# Altium PCB ADV7611-3.PcbDoc
Units mil, origin at the board's own origin, x right, y up, seen from the top; angles counter-clockwise.
Board outline 1436.53 x 1983.15 mil, 2 copper layers (Top Layer, Bottom Layer), stack 12.8 mil thick; 57 components, 82 nets, 360 pads, 158 vias.
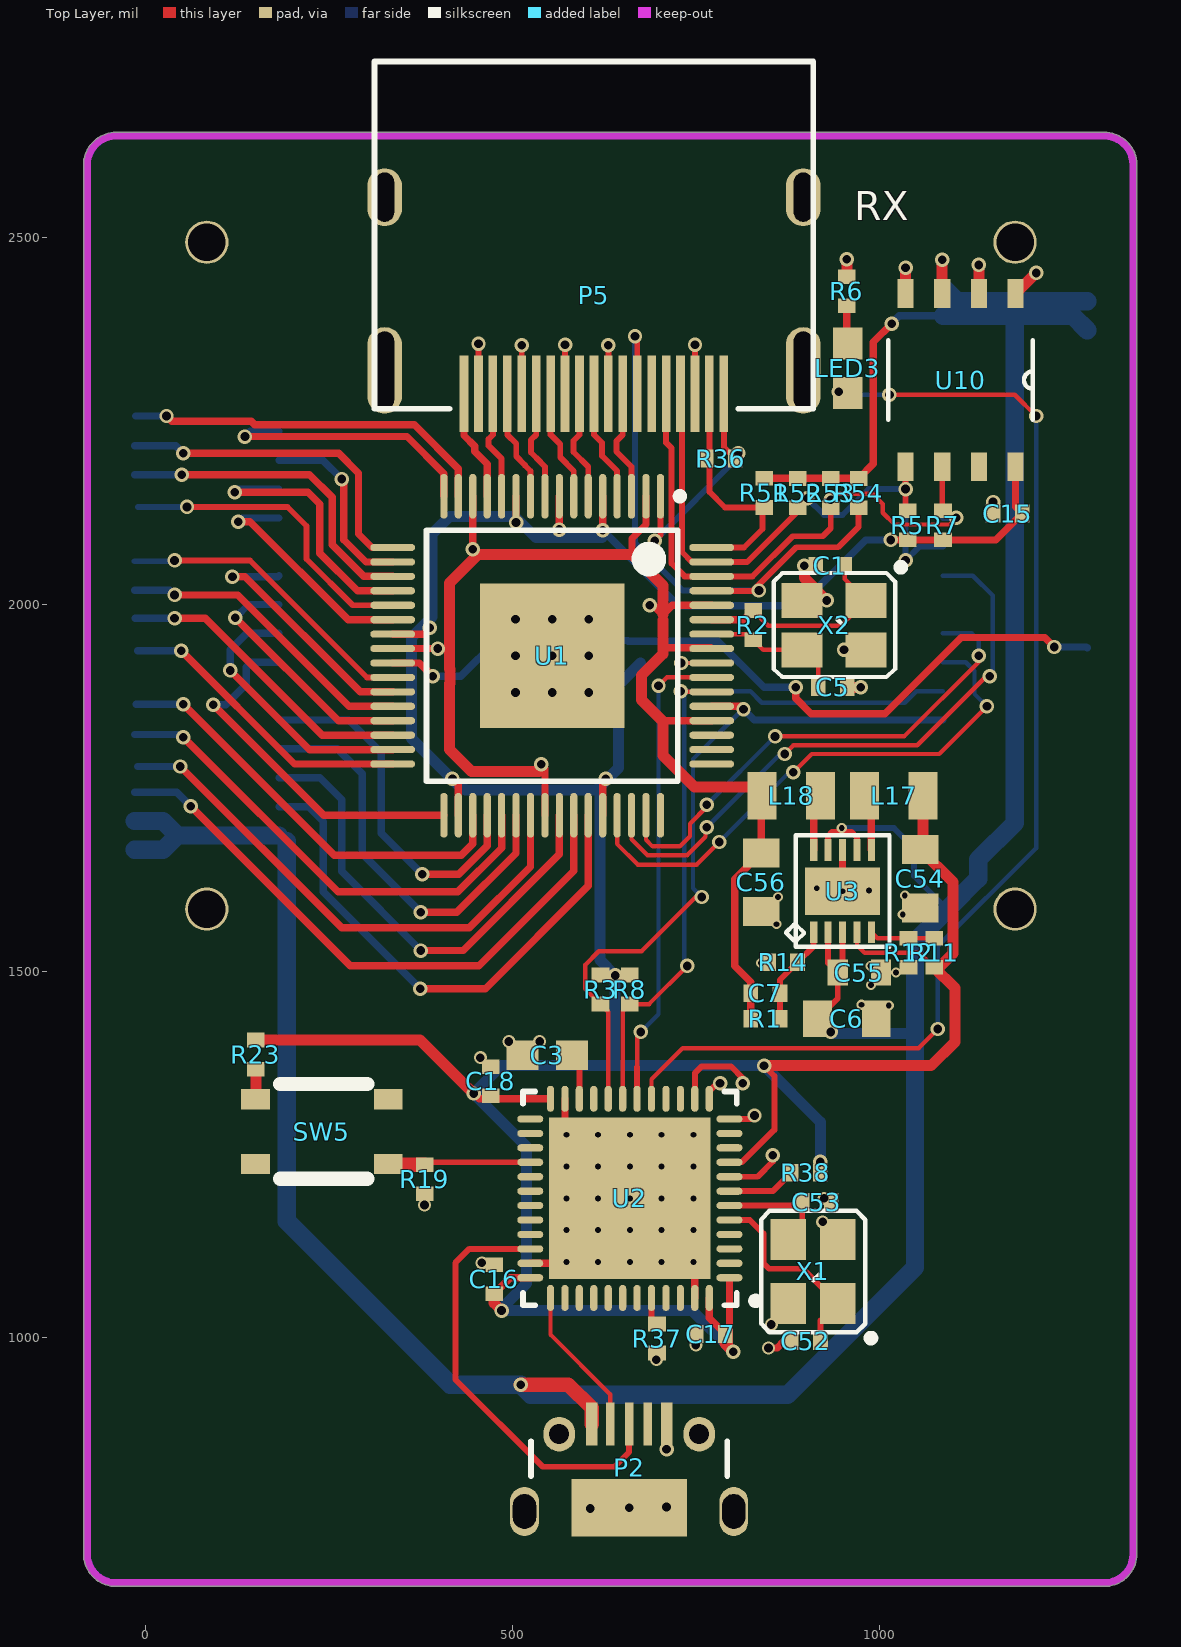
[diagram p0: Top Layer view]
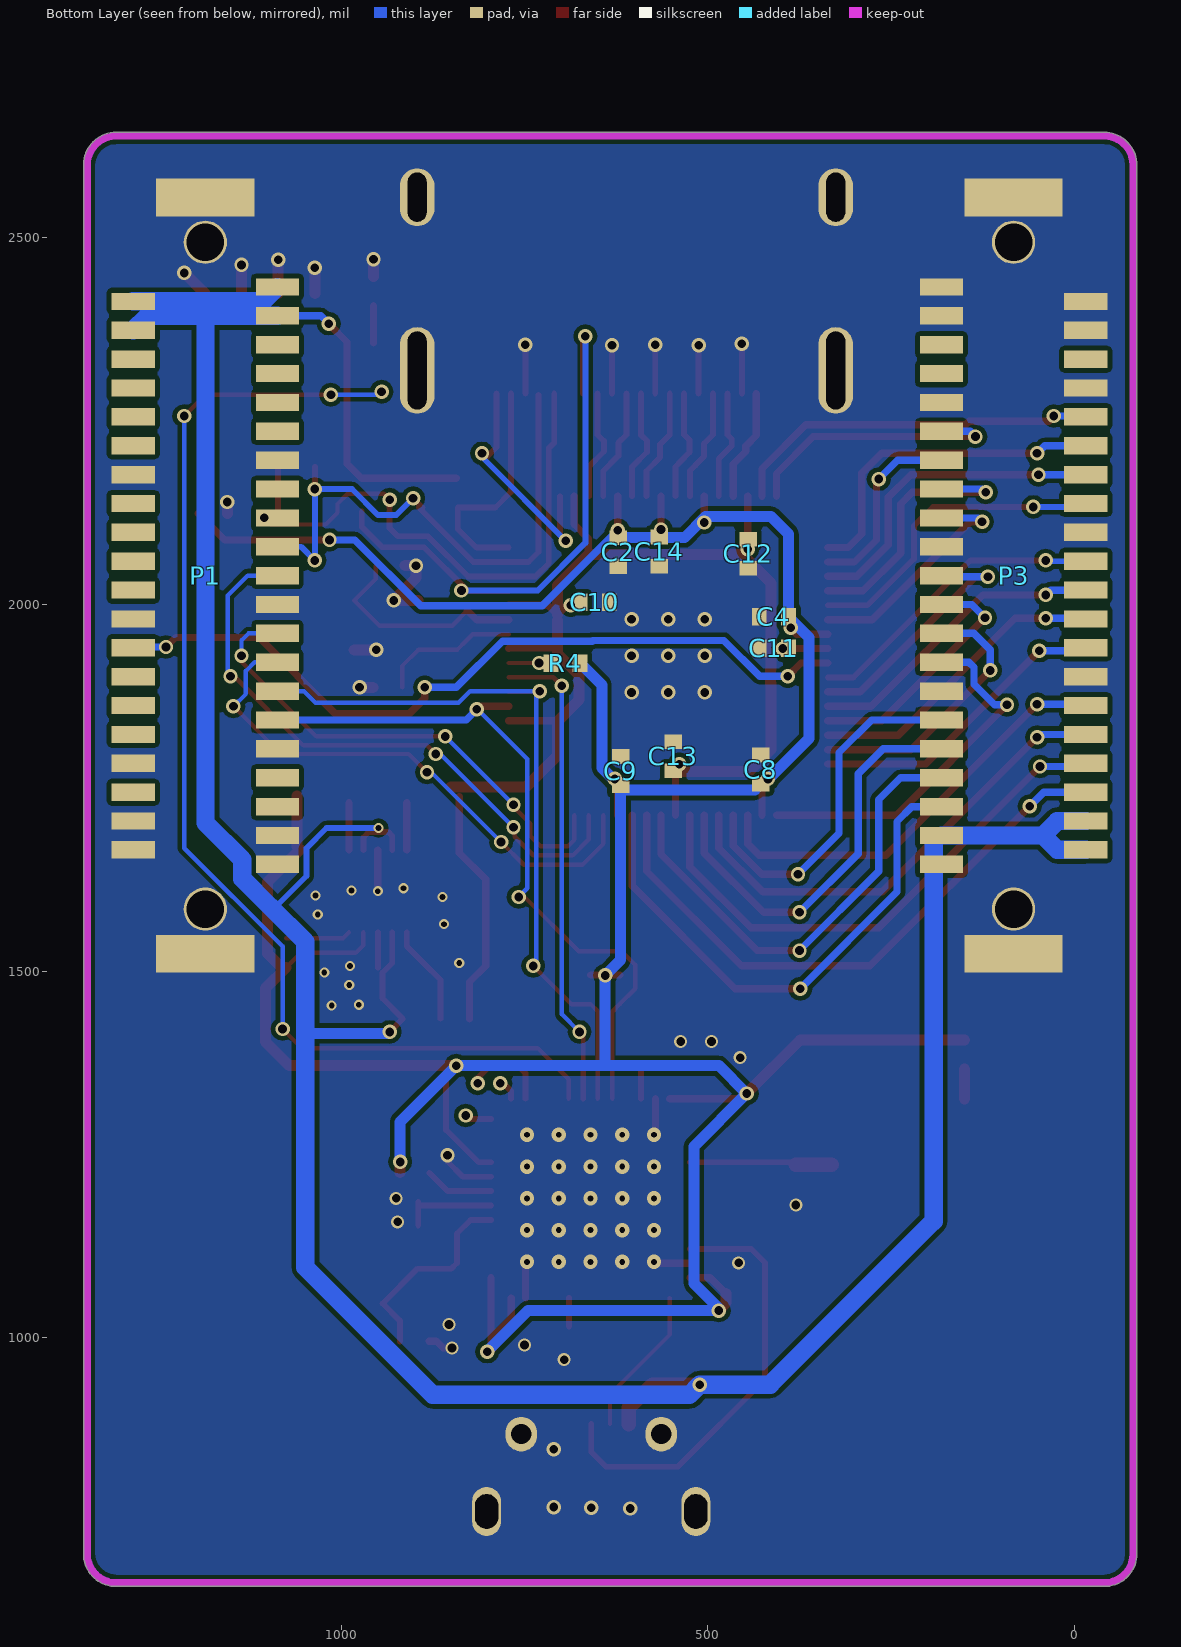
[diagram p1: Bottom Layer view, seen from below]

## Layer stack, top to bottom
Top Solder: solder mask 0.4, Solder Resist, Dk 3.5
Top Layer: signal copper 1.4
Dielectric 1: core 10, FR-4, Dk 4.2
Bottom Layer: signal copper 1.4
Bottom Solder: solder mask 0.4, Solder Resist, Dk 3.5

## Board outline
-85.11,705.09 ccw(c-40.72,705.09) -40.72,660.71 ccw(c-40.72,665.72) -40.69,660.71 1307.04,660.71 ccw(c1307.04,705.09) 1351.43,705.09 ccw(c1346.41,705.09) 1351.43,705.13 1351.43,2602.73 ccw(c1346.41,2602.73) 1351.16,2604.35 ccw(c1307.04,2599.47) 1307.04,2643.86 ccw(c1307.04,2638.84) 1306.97,2643.86 -40.72,2643.86 ccw(c-40.72,2599.47) -85.11,2599.47 ccw(c-80.09,2599.47) -85.11,2599.44

## Design rules (kind name [scope] priority, off if disabled: settings)
Clearance Clearance_1 [(InNamedPolygon('Bottom Layer-No Net')) vs Not InNet('GND')] p1: gap=15 ignorepadtopadclearanceinfootprint=FALSE except(0: Arc-Hole Track-Hole SMDPad-Hole THPad-Hole Via-Hole Fill-Hole Poly-Hole Region-Hole Text-Hole)
Clearance [All] p2: gap=6 ignorepadtopadclearanceinfootprint=FALSE except(0: Arc-Hole Track-Hole SMDPad-Hole THPad-Hole Via-Hole Fill-Hole Poly-Hole Region-Hole Text-Hole)
DiffPairsRouting [All] p1: maxlimit=10 minlimit=10 mostfreqgap=10 toplayer_minwidth=5.98 toplayer_maxwidth=15 toplayer_prefwidth=15 bottomlayer_minwidth=5.98 bottomlayer_maxwidth=15 bottomlayer_prefwidth=15 maxuncoupledlength=500
MinimumSolderMaskSliver [All] p1 off: minsoldermaskwidth=10
PlaneClearance [All] p1: clearance=10
PlaneConnect [All] p1: planeconnectstyle=Direct reliefexpansion=20 reliefentries=4 reliefconductorwidth=10 reliefairgap=10
PolygonConnect [All] p1: connectstyle=Direct reliefconductorwidth=10 reliefentries=4 polygonreliefangle="90 Angle" airgapwidth=10
RoomDefinition HDMI [InComponentClass('HDMI')] p1 off: confinementstyle=ConfineIn formatcopy=TRUE lockcomponents=FALSE outline 1396,717 2894,717 2894,1312 1396,1312
RoomDefinition interface [InComponentClass('interface')] p2 off: confinementstyle=ConfineIn formatcopy=TRUE lockcomponents=FALSE outline -5605,-2240 -3605,-2240 -3605,-1240 -5605,-1240
RoomDefinition MCU [InComponentClass('MCU')] p3 off: confinementstyle=ConfineIn formatcopy=TRUE lockcomponents=FALSE outline -595,900 1750,900 1750,1140 -595,1140
RoutingVias [All] p1: holewidth=12 width=20 viastyle="Through Hole" minholewidth=11.81 minwidth=19.68 maxholewidth=28 maxwidth=50
SilkToBoardRegionClearance [All] p1 off:
SilkToSilkClearance [All] p1 off: silktosilkclearance=10
SilkToSolderMaskClearance [IsPad] p1 off: minsilkscreentomaskgap=10 clearancetoexposedcopper=TRUE
SolderMaskExpansion [All] p1: expansion=4
Width [All] p1: maxlimit=60 minlimit=6 preferedwidth=6
23 further rules are at their usual default settings.

## Classes and differential pairs
component class MCU: C3 C6 C7 C16 C17 C18 C52 C53 C54 C55 C56 L17 L18 LED3 P2 R1 R6 R11 R12 R14 R19 R23 R28 R37 R38 SW5 U2 U3 X1
component class interface: P1 P3
component class HDMI: C1 C2 C4 C5 C8 C9 C10 C11 C12 C13 C14 C15 P5 R2 R3 R4 R5 R7 R8 R36 R51 R52 R53 R54 U1 U10 X2
net class TMDS: TMDS_CLK_N TMDS_CLK_P TMDS_D0_N TMDS_D0_P TMDS_D1_N TMDS_D1_P TMDS_D2_N TMDS_D2_P
differential pair TMDS_CLK: +TMDS_CLK_P -TMDS_CLK_N
differential pair TMDS_D0: +TMDS_D0_P -TMDS_D0_N
differential pair TMDS_D1: +TMDS_D1_P -TMDS_D1_N
differential pair TMDS_D2: +TMDS_D2_P -TMDS_D2_N

## Components (designator, comment, footprint, x,y, rotation, side; value= is the part's Value field where it differs from the comment)
C1 "Cap" 0402 933,2053 r0 top value=47p
C2 "Cap" 0402 622,2071 r90 bottom value=0.1uF
C3 "Cap" 0603 547,1385 r0 top value=4.7uF
C4 "Cap" 0402 410,1983 r180 bottom value=0.1uF
C5 "Cap" 0402 937,1887 r180 top value=47p
C6 "10UF" 0805 956,1435 r180 top
C7 "33pF" 0402 845,1470 r180 top
C8 "Cap" 0402 428,1775 r270 bottom value=0.1uF
C9 "Cap" 0402 619,1773 r270 bottom value=0.1uF
C10 "Cap" 0402 654,2003 r0 bottom value=0.1uF
C11 "Cap" 0402 410,1940 r180 bottom value=0.1uF
C12 "Cap" 0402 445,2069 r90 bottom value=0.1uF
C13 "Cap" 0402 547,1793 r270 bottom value=0.1uF
C14 "Cap" 0402 566,2072 r90 bottom value=0.1uF
C15 "100nF" 0402 1175,2124 r0 top
C16 "Cap" 0402 475,1080 r270 top value=0.1uF
C17 "Cap" 0402 770,1005 r0 top value=0.1uF
C18 "Cap" 0402 470,1350 r270 top value=0.1uF
C52 "Cap" 0402 900,995 r0 top value=20pF
C53 "Cap" 0402 915,1185 r180 top value=20pF
C54 "4.7UF" 0805 1056,1626 r90 top
C55 "33pF" 0603L 973,1498 r180 top
C56 "4.7UF" 0805 839,1621 r90 top
L17 "2.2UH" 0806 1020,1739 r0 top
L18 "2.2uH" 0806 880,1739 r180 top
LED3 "LED0" 0603 957,2322 r90 top
P1 "DF9-41S" DF9-41S 1185.36,2039.28 r270 bottom
P2 "SWD_MicroUSB" MICRO-YZX 659,652 r0 top
P3 "DF9-41S" DF9-41S 83,2039.28 r90 bottom
P5 "HDMI" HDMI-A 611,2268 r180 top
R1 "300k" 0402 845,1435 r180 top
R2 "390k" 0402 828,1972 r270 top value=0Ohm
R3 "10k" 0402 620,1475 r270 top value=0Ohm
R4 "10k" 0402 694,1920 r0 bottom value=0Ohm
R5 "10k" 0402 1039,2108 r90 top value=0Ohm
R6 "10k" 0402 956,2427 r90 top value=0Ohm
R7 "10k" 0402 1087,2108 r90 top value=0Ohm
R8 "10k" 0402 660,1475 r270 top value=0Ohm
R11 "180k" 0402 1075,1525 r270 top
R12 "180k" 0402 1040,1525 r270 top
R14 "68k" 0402 869,1512 r180 top
R19 "10k" 0402 380,1216 r90 top value=0Ohm
R23 "1k" 0402 150,1386 r90 top value=0Ohm
R36 "10k" 0402 784,2199 r180 top value=0Ohm
R37 "Res2" 0402 697,999 r270 top value=10k
R38 "Res2" 0402 900,1225 r180 top value=10k
R51 "NC/0R" 0402 843,2152 r90 top value=0Ohm
R52 "NC" 0402 889,2152 r270 top value=0Ohm
R53 "NC" 0402 934,2152 r270 top value=0Ohm
R54 "NC" 0402 972,2152 r270 top value=0Ohm
SW5 "SW-PB" SW3x4 240,1281 r180 top
U1 "ADV7611" ADV7611 554,1930 r270 top
U2 "STM32F401CCU6" STM-UFQFPN48_N 660,1190 r180 top
U3 "Tps62410" DFN-10P-3X3 950,1610 r90 top
U10 "M24M02" SO8 1111,2306 r270 top
X1 "24.000 KHz 3.2x2.5mm 8-10pf" OSCILLATOR-3.2X2.5 910,1090 r90 top
X2 "28.6363M" OSCILLATOR-3.2X2.5 939,1972 r180 top

## Footprints (in the part's own frame and the unit in brackets; to place one, negate y for a bottom-side part, rotate by r counter-clockwise, add the part's x,y. Pads: shape width x height; smd on the part's side, far side on the other; paste and mask are expansions set on the pad)
0402 [mil] "0402-RES"
  rect 20x24 smd: 1(-19.69,0) 2(20,0)
0603 [mil] "0603-RES"
  rect 44x40 smd: 1(-33.46,0) 2(34,0)
0603L [mm]
  rect 0.7x0.9 smd: 1(-0.75,0) 2(0.75,0)
  body extent -0.8,-0.4 0.8,0.4, height 0.8
0805 [mil]
  rect 39.37x50 smd: 1(-40,0) 2(40,0)
  body extent -50,-30 50,30, height 31
0806 [mm]
  rect 1x1.65 smd: 1(-1.016,0) 2(1.016,0)
  body extent -1,-0.8 1,0.8, height 0.5
ADV7611 [mm] "Thin QFP, 64-Leads, Body 10x10mm, Pitch 0.5mm, IPC High Density"
  rect 5x5 smd: 0(0,0)
  oval 1.55x0.25 smd: 1(-5.525,3.75) 2(-5.525,3.25) 3(-5.525,2.75) 4(-5.525,2.25) 5(-5.525,1.75) 6(-5.525,1.25) 7(-5.525,0.75) 8(-5.525,0.25) 9(-5.525,-0.25) 10(-5.525,-0.75) 11(-5.525,-1.25) 12(-5.525,-1.75) 13(-5.525,-2.25) 14(-5.525,-2.75) 15(-5.525,-3.25) 16(-5.525,-3.75) 33(5.525,-3.75) 34(5.525,-3.25) 35(5.525,-2.75) 36(5.525,-2.25) 37(5.525,-1.75) 38(5.525,-1.25) 39(5.525,-0.75) 40(5.525,-0.25) 41(5.525,0.25) 42(5.525,0.75) 43(5.525,1.25) 44(5.525,1.75) 45(5.525,2.25) 46(5.525,2.75) 47(5.525,3.25) 48(5.525,3.75)
  oval 0.25x1.55 smd: 17(-3.75,-5.525) 18(-3.25,-5.525) 19(-2.75,-5.525) 20(-2.25,-5.525) 21(-1.75,-5.525) 22(-1.25,-5.525) 23(-0.75,-5.525) 24(-0.25,-5.525) 25(0.25,-5.525) 26(0.75,-5.525) 27(1.25,-5.525) 28(1.75,-5.525) 29(2.25,-5.525) 30(2.75,-5.525) 31(3.25,-5.525) 32(3.75,-5.525) 49(3.75,5.525) 50(3.25,5.525) 51(2.75,5.525) 52(2.25,5.525) 53(1.75,5.525) 54(1.25,5.525) 55(0.75,5.525) 56(0.25,5.525) 57(-0.25,5.525) 58(-0.75,5.525) 59(-1.25,5.525) 60(-1.75,5.525) 61(-2.25,5.525) 62(-2.75,5.525) 63(-3.25,5.525) 64(-3.75,5.525)
  silkscreen extent -5.65,-4.35 4.35,4.55, body extent -5,-5 5,5, height 1.6
DF9-41S [mm]
  rect 1.3x3.4 smd: 0(-13.1,0) 0(13.1,0)
  round 1.5 hole 1.3: 0(-11.55,0) 0(11.55,0)
  rect 0.6x1.5 smd: 1(-10,2.5) 2(-9,2.5) 3(-8,2.5) 4(-7,2.5) 5(-6,2.5) 6(-5,2.5) 7(-4,2.5) 8(-3,2.5) 9(-2,2.5) 10(-1,2.5) 11(0,2.5) 12(1,2.5) 13(2,2.5) 14(3,2.5) 15(4,2.5) 16(5,2.5) 17(6,2.5) 18(7,2.5) 19(8,2.5) 20(9,2.5) 21(10,2.5) 22(9.5,-2.5) 23(8.5,-2.5) 24(7.5,-2.5) 25(6.5,-2.5) 26(5.5,-2.5) 27(4.5,-2.5) 28(3.5,-2.5) 29(2.5,-2.5) 30(1.5,-2.5) 31(0.5,-2.5) 32(-0.5,-2.5) 33(-1.5,-2.5) 34(-2.5,-2.5) 35(-3.5,-2.5) 36(-4.5,-2.5) 37(-5.5,-2.5) 38(-6.5,-2.5) 39(-7.5,-2.5) 40(-8.5,-2.5) 41(-9.5,-2.5)
DFN-10P-3X3 [mm]
  rect 0.75x0.25 smd mask+0.064: 1(-1.451,0.999) 2(-1.451,0.499) 3(-1.451,-0.001) 4(-1.451,-0.501) 5(-1.451,-1.001) 6(1.4,-1.001) 7(1.4,-0.501) 8(1.4,-0.001) 9(1.4,0.499) 10(1.4,0.999)
  rect 1.64x2.6 smd: 11(-0.025,-0.001)
  silkscreen extent -1.96,-1.63 1.9,1.95
HDMI-A [mm]
  oval 1.2x3 hole 0.65 slot 2.7 at 90 deg: 0(-7.25,-1.3) 0(7.25,-1.3)
  oval 1.2x2 hole 0.65 slot 1.7 at 90 deg: 0(-7.25,-7.3) 0(7.25,-7.3)
  rect 0.3x2.65 smd: 1(4.5,-0.5) 2(4,-0.5) 3(3.5,-0.5) 4(3,-0.5) 5(2.5,-0.5) 6(2,-0.5) 7(1.5,-0.5) 8(1,-0.5) 9(0.5,-0.5) 10(0,-0.5) 11(-0.5,-0.5) 12(-1,-0.5) 13(-1.5,-0.5) 14(-2,-0.5) 15(-2.5,-0.5) 16(-3,-0.5) 17(-3.5,-0.5) 18(-4,-0.5) 19(-4.5,-0.5)
  silkscreen extent -7.6,-12 7.6,0.03
MICRO-YZX [mm]
  rect 0.4x1.5 smd: 1(-1.3,5.85) 5(1.3,5.85)
  rect 0.3x1.5 smd: 2(-0.65,5.85) 3(0,5.85) 4(0.65,5.85)
  oval 1x1.7 hole 0.8 slot 1.2 at 90 deg: 5(-3.625,2.82) 5(3.625,2.82)
  oval 1.1x1.2 hole 0.7: 5(-2.425,5.5) 5(2.425,5.5)
  rect 4x2 smd: 5(0,2.95)
  silkscreen extent -3.4,4.05 3.4,5.25, body extent -4.02,0.33 3.98,5.93, height 2.6
OSCILLATOR-3.2X2.5 [mil] "OSCILLATOR-3.2X2.5"
  rect 56x48 smd: 1(-43.31,-33.46) 2(44,-33.46) 3(44,34) 4(-43.31,34)
  silkscreen extent -95,-83 83,71
SO8 [mm]
  rect 1x0.559 smd: 1(-3,1.905) 2(-3,0.635) 3(-3,-0.635) 4(-3,-1.905) 5(3,-1.905) 6(3,-0.635) 7(3,0.635) 8(3,1.905)
  silkscreen extent -1.37,-2.5 1.37,2.5, body extent -3,-2.45 3,2.45, height 1.63
STM-UFQFPN48_N [mm] "QFN, 48-Leads, Body 7.1x7.1mm, Pitch 0.5mm, Thermal Pad 5.6x5.6mm, IPC Medium Density"
  oval 0.9x0.25 smd: 1(-3.45,2.75) 2(-3.45,2.25) 3(-3.45,1.75) 4(-3.45,1.25) 5(-3.45,0.75) 6(-3.45,0.25) 7(-3.45,-0.25) 8(-3.45,-0.75) 9(-3.45,-1.25) 10(-3.45,-1.75) 11(-3.45,-2.25) 12(-3.45,-2.75) 25(3.45,-2.75) 26(3.45,-2.25) 27(3.45,-1.75) 28(3.45,-1.25) 29(3.45,-0.75) 30(3.45,-0.25) 31(3.45,0.25) 32(3.45,0.75) 33(3.45,1.25) 34(3.45,1.75) 35(3.45,2.25) 36(3.45,2.75)
  oval 0.25x0.9 smd: 13(-2.75,-3.45) 14(-2.25,-3.45) 15(-1.75,-3.45) 16(-1.25,-3.45) 17(-0.75,-3.45) 18(-0.25,-3.45) 19(0.25,-3.45) 20(0.75,-3.45) 21(1.25,-3.45) 22(1.75,-3.45) 23(2.25,-3.45) 24(2.75,-3.45) 37(2.75,3.45) 38(2.25,3.45) 39(1.75,3.45) 40(1.25,3.45) 41(0.75,3.45) 42(0.25,3.45) 43(-0.25,3.45) 44(-0.75,3.45) 45(-1.25,3.45) 46(-1.75,3.45) 47(-2.25,3.45) 48(-2.75,3.45)
  rect 5.6x5.6 smd: 49(0,0)
  silkscreen extent -4.48,-3.7 3.7,3.7, body extent -3.55,-3.55 3.55,3.55, height 0.6
SW3x4 [mm]
  rect 1x0.7 smd: 1(-2.3,1.125) 2(2.3,-1.125) 3(2.3,1.125) 4(-2.3,-1.125)
  silkscreen extent -1.58,-1.65 1.45,1.63, body extent -2,-1.5 2,1.5, height 2.6

## Part data
C1 C2 C3 C4 C5 C8 C9 C10 C11 C12 C13 C14 C16 C17 C18 C52 C53: "Capacitor", LatestRevisionDate=17-Jul-2002, LatestRevisionNote="Re-released for DXP Platform.", PackageDescription="Radial Cap, Thru-Hole; 2 Leads; 0.3 in Pin Spacing", PackageReference=RAD-0.3, Published=8-Jun-2000, Publisher="Altium Limited"
C6 C7 C15 C54 C55 C56: library part CAP/0402, 1st Part Field=0402
L17 L18: library part L/2.5*2.0
LED3: "Typical INFRARED GaAs LED", LatestRevisionDate=08-Jul-2005, LatestRevisionNote="Mech Layer 1 removed.", PackageDescription="LED; 2 Leads", PackageReference=LED-0, Published=8-Jun-2000, Publisher="Altium Limited"
P2: "Connector SMD USB Micro Type B middle mount", Manufacturer 1="Molex Inc", Package / Case=SMD, Supplier Part Number 1=WM17142CT-ND, SCDType=undef, Supplier 1=Digi-Key
R1 R11 R12 R14: library part RES/0402_3
R2 R3 R4 R5 R6 R7 R8 R19 R23 R36 R51 R52 R53 R54: library part Res2, "Resistor", LatestRevisionDate=17-Jul-2002, LatestRevisionNote="Re-released for DXP Platform.", PackageDescription="Axial Device, Thru-Hole; 2 Leads; 0.4 in Pin Spacing", PackageReference=AXIAL-0.4, Published=8-Jun-2000, Publisher="Altium Limited"
R37 R38: "Resistor", LatestRevisionDate=17-Jul-2002, LatestRevisionNote="Re-released for DXP Platform.", PackageDescription="Axial Device, Thru-Hole; 2 Leads; 0.4 in Pin Spacing", PackageReference=AXIAL-0.4, Published=8-Jun-2000, Publisher="Altium Limited"
SW5: "Switch", LatestRevisionDate=17-Jul-2002, LatestRevisionNote="Re-released for DXP Platform.", PackageDescription="Switch; 2 Leads", PackageReference=SPST-2, Published=24-Mar-1999, Publisher="Altium Limited"
U2: "ARM Cortex-M4 32-bit MCU+FPU, 105 DMIPS, 256 kB Flash, 64 kB Internal RAM, 36 I/Os, 48-pin UFQFPN, -40 to 85 degC, Tray", I/Os (High Current)=36, Manufacturer=STMicroelectronics, Operating Frequency(F) (Processor speed) (MHz)=84, Supplier Part Number 1=19X6217, Supply Voltage(Vcc) max (V)=3.6, Supply Voltage(Vcc) min (V)=1.8, ComponentLink1Description="Manufacturer URL", ComponentLink1URL=http://www.st.com/web/en/home.html, ComponentLink2Description=Datasheet, ComponentLink2URL=http://www.st.com/st-web-ui/static/active/en/resource/technical/document/data_brief/DM00071938.pdf, ComponentLink3Description="Package Specification", ComponentLink3URL=http://www.st.com/st-web-ui/static/active/en/resource/technical/document/data_brief/DM00071938.pdf, Core="ARM Cortex-M4", DatasheetVersion="Rev. 1", FLASH Size (Prog) (kB)=256, Internal RAM Size (kB)=64, Mounting Technology="Surface Mount", PackageDescription="48-Pin Ultra Thin Fine Pitch Quad Flat No-Lead, 7 x 7 x 0.6 mm Body, 0.5 mm Pitch, Exposed Pad", PackageReference=UFQFPN48, PackageVersion="Rev. 1, 04/2013", Packing=Tray, PartNumber=STM32F401CCU6, Supplier 1=Newark, Supplier 2=Mouser, Supplier Part Number 2=511-STM32F401CCU6
X1 X2: library part OSCILLATOR-3.2X2.5, "Crystal Oscillator in 3.2x2.5 SMD"

## Via types
v1: diameter 19.68, hole 11.81, Top Layer to Bottom Layer, 108 vias
v2: diameter 19.68, hole 7.87, Top Layer to Bottom Layer, 25 vias
v3: diameter 13.78, hole 7.87, Top Layer to Bottom Layer, 14 vias
v4: diameter 17.72, hole 11.81, Top Layer to Bottom Layer, 11 vias

## Nets (pads, with @x,y where several pads share a name; then routed paths per layer and width w, separated by ;. In a path a pad name is that pad's centre, name@x,y a point inside that pad or via, vN(x,y) a via of type N, cw(c..) or ccw(c..) an arc to the next point about the centre after c; other vN are vias at no path point)
1.8D: C7.2 C10.2 C11.2 C12.2 C13.2 C56.2 L18.2 R1.2 U1.2 U1.14 U1.24 U1.40 U1.52 U1.57 U1.60 | length 1980.5
  Top Layer w10: U1.24 v1(398,1939.84) 413.84,1939.84 ; U1.14 v1(445.73,2075.27) 453,2068 ; v1(539,1782) 544.16,1776.84 U1.40 ; 663,2068 663,2090 681.95,2108.95 U1.2 ; v1(687,1999) 692,1999 705,1986 ; 705,1979 705,1986 ; 705.16,1939.84 706.31,1941 770.36,1941 U1.57 ; 705.42,1841.42 U1.52 ; U1.60 717.9,1998.9 705,1986 ; R1.2 C7.2 825,1485 803,1507 803,1625 C56.2 L18.2@839,1738
  Top Layer w15: 536,1772 444,1772 414,1802 414,1891.99 414.34,1892.33 414.34,1911.67 414,1912.01 414,2029 453,2068 663,2068 705,2026 705,1986 ; 705,1979 705,1932.75 675.66,1903.41 675.66,1869.59 705,1840.25 705,1794 748,1751 L18.2@850.47,1751
3.3D: C2.2 C4.2 C8.2 C9.2 C14.2 C15.2 C16.2 C17.2 C18.2 C54.2 L17.2 R3.1 R4.1 R5.1 R7.1 R8.1 R11.2 R23.2 R38.1 U1.5 U1.8 U1.11 U1.23 U1.34 U1.44 U2.1 U2.9 U2.24 U2.36 U2.48 U3.4 U10.8 | length 5401.4
  Top Layer w6: U3.4 969.72,1535.28 980.28,1524.72 1055.28,1524.72 R11.2 R11.2@1079,1505
  Top Layer w8: U2.9 812.76,1239.21 857,1283.46 857,1357 v1(843,1371)
  Top Layer w10: U1.23 378.53,1959.53 v1(387,1968) ; v1(418,1762) 426.05,1753.95 U1.34 ; v1(447,1333) 454.17,1325.83 U2.24 ; C16.2 496.73,1081.73 U2.36 ; v1(504.79,2111.79) U1.11 ; v1(563.84,2102.16) U1.8 ; R3.1 R8.1 ; U1.44 622.9,1757.9 v1(627,1762) ; v1(622.9,2101.1) U1.5 ; U2.48 768.27,1026.73 C17.2 ; v1@795.83,986.17 U2.1 ; v1(1016,2088) 1159,2088 C15.2 1186,2133 U10.8
  Top Layer w15: R23.2 374,1406 v1(447,1333) ; C16.2 475,1047 v1(485,1037) ; C17.2 790,992 795.83,986.17 v1(801,981) ; v1(843,1371) 1071,1371 1103.34,1403.34 1103.34,1476.66 R11.2 ; R38.1 v1(919.69,1239.68) ; C54.2 1100.5,1621.5 1100.5,1524 1081.5,1505 R11.2@1079,1505 ; C54.2@1060,1670 L17.2
  Bottom Layer w10: v1(622.9,2101.1) 725.84,1998.16 891.68,1998.16 981.52,2088 v1(1016,2088)
  Bottom Layer w15: C2.2 532,2091 503,2120 414,2120 390,2096 C4.2 362,1955 362,1817 424,1755 C8.2 436,1747 C9.2@619,1747 ; R4.1 644.5,1890.19 644.5,1777.09 620.41,1753 C9.2 C9.2@619,1747 ; v1(801,981) 745,1037 v1(485,1037) 485,1040 519,1074 519,1261 v1(447,1333) 485,1371 640,1371 ; v1(919.69,1239.68) 919.69,1294.32 v1(843,1371) 640,1371 ; C9.2@619,1747 619,1515 v1(640,1494) 640,1371
5V: C6.2 C55.2 P1.1 P1.2 P1.40 P1.41 P2.1 P3.1 P3.2 P3.40 P3.41 R51.2 R52.1 R53.1 R54.1 U3.2 U3.3 U3.7 U3.9 | length 4789.3
  Top Layer w8: U3.2 930.35,1511.12 C55.2 943.47,1462.47 C6.2 v1(934,1417) ; U3.9 930.35,1684.35 935.89,1689.89 962.11,1689.89 969.72,1682.28 U3.7 ; C55.2@950.03,1504.56 U3.3
  Top Layer w10: R51.2 971.69,2172 R54.1 992,2191.69 992,2358 v1(1017,2383)
  Top Layer w20: v1(511,936) 576,936 607.82,904.18 P2.1
  Bottom Layer w8: v1(934,1417) v1@936,1415 ; v3(949,1695) 1020,1695 1047.41,1667.59 1047.41,1629.62 1088.9,1588.13 1097,1588.13
  Bottom Layer w10: v1(1017,2383) 1027.61,2393.61 P1.2
  Bottom Layer w15: v1@936,1415 1048.87,1415
  Bottom Layer w25: P3.41 23.26,1665.26 42.94,1684.94 ; P3.40 23.26,1704.63 42.94,1684.94 ; P3.2 42.94,1684.94 ; P3.2@192,1677 192,1159 415,936 v1(511,936) 525,922 875,922 1048.87,1095.87 1048.87,1415 1048.87,1540 1097,1588.13 1134.97,1626.1 1134.97,1652 1185,1702.03 1185,2393.61 ; P1.2 1185,2393.61 ; P1.1 1106.62,2413.29 1194,2413.29 ; P1.40 1264.11,2393.61 1185,2393.61 ; P1.41 1194,2413.29 ; 1185,2393.61 1185,2404.29 1194,2413.29
GND: C1.1 C2.1 C3.1 C4.1 C5.1 C6.1 C8.1 C9.1 C10.1 C11.1 C12.1 C13.1 C14.1 C15.1 C16.1 C17.1 C18.1 C52.1 C53.1 C54.1 C55.1 C56.1 P1.0 P1.7 P1.12 P1.17 P1.20 P1.21 P1.22 P1.23 P1.25 P1.30 P1.35 P2.5 P3.0 P3.7 P3.12 P3.17 P3.20 P3.21 P3.22 P3.23 P3.25 P3.30 P3.35 P5.0 P5.2 P5.5 P5.8 P5.11 P5.17 R6.2 R12.2 R14.2 R19.1 R37.2 U1.0 U2.8 U2.23 U2.35 U2.47 U2.49 U3.8 U3.11 U10.1 U10.2 U10.3 U10.4 X1.2 X1.4 X2.2 X2.4 | length 998.3
  Top Layer w8: P5.2 v1(453.52,2355.52) ; P5.5 v1(512.57,2353.43) ; P5.8 v1(571.63,2354.37) ; P5.11 v1(630.69,2353.31) ; P5.17 v1(748.8,2354.2) ; U2.8 834.21,1219.53 855,1240.32 v1(855,1249)
  Top Layer w10: U2.35 U2.49@571.42,1101.42 ; U2.49@571.42,1278.58 U2.23 ; U2.47 U2.49@748.58,1101.42 ; v4(849,986) 861,986 870,995 C52.1 ; v3(950.03,1609) U3.8
  Top Layer w15: X2.2 v1(928.46,2005.46) 898,2035.93 v1(898,2053) C1.1 ; v1(952,1938) X2.4 ; R6.2 v1(956,2471) ; C5.1 v1(975,1887) ; U10.4 v1(1036,2459) ; U10.3 v1(1086,2470) ; U10.2 v1(1136,2463) ; C15.1 v1(1155.31,2139.69) ; U10.1 v1(1214,2452.11)
  other v1: 606,767 659,768.14 710,769 710,848 504,1880 554,1880 604,1880 504,1930 554,1930 604,1930 504,1980 554,1980 604,1980
  other v2: 573.39,1103.39 616.69,1103.39 660,1103.39 703.31,1103.39 746.61,1103.39 573.39,1146.69 616.69,1146.69 660,1146.69 703.31,1146.69 746.61,1146.69 573.39,1190 616.69,1190 660,1190 703.31,1190 746.61,1190 573.39,1233.31 616.69,1233.31 660,1233.31 703.31,1233.31 746.61,1233.31 573.39,1276.61 616.69,1276.61 660,1276.61 703.31,1276.61 746.61,1276.61
  other v3: 1013,1453 976,1454 989,1481 1023,1498 988,1507 839,1511 860,1564 1032,1577 862,1601 1035,1603 986,1610 915,1613
  other v4: 696,970 750,990 853,1018 458,1102 923,1158 380,1181 925,1190 456,1382 495,1404 537,1404
HPA: P5.19 R36.1 U1.1 | length 325
  Top Layer w8: v1(694,2087) 701.64,2094.64 U1.1 ; P5.19 788.17,2214.52 R36.1
  Bottom Layer w8: v1(694,2087) 808,2201 v1(808,2206)
KEY2: U2.25
KEY3: U2.26
KEY4: U2.27
KEY5: R19.2 SW5.1 U2.28 | length 204.8
  Top Layer w8: R19.2@369,1237 371.21,1239.21 U2.28
  Top Layer w20: SW5.1@331.26,1236 R19.2
LED: LED3.1 U2.17 | length 1619.7
  Top Layer w6: U2.17 689.53,1352.53 732,1395 1054,1395 v1(1080,1421) ; v1(1014,2286) 1185,2286 v1(1214,2257)
  Bottom Layer w6: v1(945,2290) 949,2286 v1(1014,2286) ; v1(1080,1421) 1080,1533.68 1214,1667.68 v1(1214,2257)
NetC1_2: C1.2 R2.1 U1.59 X2.1 | length 298.5
  Top Layer w6: R2.1 848.69,1971 947.84,1971 X2.1 953,2034.77 C1.2
  Top Layer w10: U1.59 815.53,1979.21 R2.1
NetC3_2: C3.2 U2.22 | length 47.1
  Top Layer w8: U2.22 C3.2@591.1,1372.9
NetC5_2: C5.2 R2.2 U1.58 X2.3 | length 192.5
  Top Layer w6: U1.58 820.47,1959.53 R2.2 842,1938 X2.3 917,1916 C5.2
NetC7_1: C7.1 R1.1 R14.1 U3.1 | length 136.9
  Top Layer w8: R1.1 C7.1 864.69,1488 R14.1 910.66,1533.98 U3.1
NetC52_2: C52.2 U2.5 X1.1 | length 279.7
  Top Layer w8: U2.5 823.53,1160.47 842,1142 842,1101.86 849.86,1094 896.16,1094 X1.1 920,1023.23 C52.2
NetC53_2: C53.2 U2.6 X1.3 | length 126.3
  Top Layer w8: U2.6 C53.2@890.16,1180.16 ; X1.3@895,1153 C53.2
NetL17_1: L17.1 U3.6 | length 64.5
  Top Layer w10: U3.6 L17.1@989.4,1729.6
NetL18_1: L18.1 U3.10 | length 64.5
  Top Layer w10: U3.10 L18.1@910.66,1729.66
NetLED3_2: LED3.2 R6.1 | length 50.3
  Top Layer w10: LED3.2@956,2357 R6.1
NetP1_9: P1.9 P5.15 R7.2 R53.2 U1.62 U10.6 | length 799.8
  Top Layer w6: v1(934,2143) 942,2151 991,2151 1005,2137 1005,2125 1021,2109 1095.97,2109 v1(1104.98,2118.02)
  Top Layer w8: P5.15 709.43,2220.57 717.01,2212.99 717.01,2055.99 734.73,2038.27 U1.62 827.21,2038.27 881.94,2093 923,2093 934,2104 R53.2@934,2127 ; R53.2 v1(934,2143) ; R7.2@1086,2129 U10.6
  Bottom Layer w8: P1.9 v1(1104.98,2118.02)
NetP1_10: P1.10 P5.16 R5.2 R52.2 U1.63 U10.5 | length 798.1
  Top Layer w8: P5.16@731.01,2285.79 731.01,2071.46 744.51,2057.95 U1.63 819.95,2057.95 R52.2@894,2132 ; R52.2 v1(902,2145) ; R5.2@1036,2136 v1(1036,2157.39) U10.5
  Bottom Layer w8: v1(902,2145) 925,2122 950,2122 985.39,2157.39 v1(1036,2157.39) v1(1036,2060) 1054.65,2078.65 P1.10
NetP1_11: P1.11 U1.46 | length 828.9
  Top Layer w6: U1.46 662.27,1679.73 684,1658 738,1658 763.16,1683.16 763.16,1694.16 v1(765,1696) ; v1(871,1796) 883,1808 1052,1808 1146,1902 v1(1151,1902)
  Bottom Layer w6: v1(765,1696) 865,1796 v1(871,1796) ; P1.11 1127.72,2039.28 1154.84,2012.16 1154.84,1905.84 v1(1151,1902)
NetP1_13: P1.13 U1.47 | length 689.3
  Top Layer w6: U1.47 681.95,1679.05 691,1670 728,1670 742,1684 742,1701 765,1724 v1(765,1727) ; v1(858,1820) 1034,1820 1136,1922 v1(1136,1930)
  Bottom Layer w6: v1(765,1727) v1(858,1820) ; P1.13 1126.46,1960.54 1136,1951 v1(1136,1930)
NetP1_14: P1.14 U1.45 | length 756.6
  Top Layer w6: U1.45 642.58,1673.42 671,1645 751,1645 v1(782,1676) ; v1(883,1771) 908,1796 1082,1796 v1(1147,1861)
  Bottom Layer w6: v1(782,1676) 883,1777 v1(883,1771) ; P1.14 1118.19,1921.17 1130,1909.35 1130,1878 v1(1147,1861)
NetP1_15: P1.15 R8.2 U1.54 U2.19 | length 1022.2
  Top Layer w6: U2.19 650.16,1445.16 R8.2 686.24,1455 v1(738.24,1507) ; v1@730.21,1880.79 U1.54
  Bottom Layer w6: v1(729.16,1881.84) v1@735.16,1881.84 ; v1(738.24,1507) 734.16,1511.08 734.16,1880.84 v1@735.16,1881.84 ; P1.15 1050.81,1881.8 1035.02,1866 840,1866 824.16,1881.84 v1@735.16,1881.84
NetP1_16: P1.16 R3.2 U1.53 U2.20 | length 1000.3
  Top Layer w6: U2.20 630.47,1444.53 R3.2 599,1476 599,1508.41 617.59,1527 676,1527 750,1601 v1(758,1601)
  Top Layer w10: U1.53 v1@810.9,1861.1
  Bottom Layer w6: v1(758,1601) 746.16,1612.84 746.16,1789.16 814,1857 v1(815,1857)
  Bottom Layer w10: v1(815,1857) 829.57,1842.43 P1.16
NetP1_29: P1.29 U1.25 | length 1074.1
  Top Layer w10: U1.25 372.84,1920.16 v1(391,1902) ; v1(886,1887) 886,1872 907,1851 1008,1851 1112,1955 1226,1955 v1(1239,1942)
  Bottom Layer w10: v1(391,1902) 429.24,1902 478.08,1950.84 656.92,1950.84 657.76,1950 780,1950 843,1887 v1(886,1887) ; v1(1239,1942) 1282.64,1942 P1.29
NetP3_3: P3.3 U1.43 | length 735.2
  Top Layer w10: v1(374,1476) 463,1476 603.21,1616.21 U1.43
  Bottom Layer w10: P3.3 221.69,1724.32 242,1704 242,1608 v1(374,1476)
NetP3_4: P3.4 U1.41 | length 645.1
  Top Layer w10: v1(375,1528) 432.63,1528 563.84,1659.22 U1.41
  Bottom Layer w10: P3.4 237.31,1763.68 267,1734 267,1636 v1(375,1528)
NetP3_5: P3.5 U1.38 | length 564.8
  Top Layer w10: v1(375,1580) 424,1580 504.79,1660.79 U1.38
  Bottom Layer w10: P3.5 260.94,1803.06 295,1769 295,1660 v1(375,1580)
NetP3_6: P3.6 U1.36 | length 493.3
  Top Layer w10: v1(377,1632) 426.63,1632 465.42,1670.79 U1.36
  Bottom Layer w10: P3.6 276.57,1842.43 321,1798 321,1688 v1(377,1632)
NetP3_8: P3.8 U1.33 | length 503.8
  Top Layer w10: v1(92,1863) 242.52,1712.48 U1.33
  Bottom Layer w10: v1(92,1863) 109,1863 137,1891 137,1914.14 144.03,1921.17 P3.8
NetP3_9: P3.9 U1.31 | length 370
  Top Layer w10: v1(115,1910) 222.95,1802.05 U1.31
  Bottom Layer w10: v1(115,1910) 115,1938 137.54,1960.54 P3.9
NetP3_10: P3.10 U1.29 | length 339.6
  Top Layer w10: v1(122,1982) 262.58,1841.42 U1.29
  Bottom Layer w10: v1(122,1982) 139.91,1999.91 P3.10
NetP3_11: P3.11 U1.27 | length 347.6
  Top Layer w10: v1(118,2038) 135,2038 292.21,1880.79 U1.27
  Bottom Layer w10: v1(118,2038) 180.15,2038 P3.11
NetP3_13: P3.13 U1.22 | length 323.4
  Top Layer w10: v1(126,2113) 142,2113 275.79,1979.21 U1.22
  Bottom Layer w10: v1(126,2113) 131.02,2118.02 P3.13
NetP3_14: P3.14 U1.20 | length 372.6
  Top Layer w10: v1(121,2153) 221,2153 237,2137 237,2070 288.42,2018.58 U1.20
  Bottom Layer w10: v1(121,2153) 125.39,2157.39 P3.14
NetP3_15: P3.15 U1.18 | length 259.4
  Top Layer w10: v1(267,2171) 270,2168 270,2088 300.05,2057.95 U1.18
  Bottom Layer w10: P3.15 241.24,2196.76 v1(267,2171)
NetP3_16: P3.16 U1.16 | length 372.7
  Top Layer w10: v1(135,2229) 356,2229 406.36,2178.64 U1.16
  Bottom Layer w10: v1(135,2229) 142.13,2236.13 P3.16
NetP3_26: P3.26 U1.15 | length 507.7
  Top Layer w10: v1(28,2257) 35.16,2249.84 143.63,2249.84 148.48,2245 366.31,2245 426.05,2185.27 U1.15
  Bottom Layer w10: P3.26@-14.23,2257 v1(28,2257)
NetP3_27: P3.27 U1.17 | length 458
  Top Layer w10: v1(51,2206) 263,2206 290,2179 290,2096 308.36,2077.64 U1.17
  Bottom Layer w10: P3.27 40.56,2216.44 v1(51,2206)
NetP3_28: P3.28 U1.19 | length 447.3
  Top Layer w10: v1(49,2177) 223,2177 254,2146 254,2081.37 297.1,2038.27 U1.19
  Bottom Layer w10: P3.28 -15.35,2177 v1(49,2177)
NetP3_29: P3.29 U1.21 | length 429.1
  Top Layer w8: v1(56,2133) 193,2133 219,2107 219,2062 282.1,1998.9 U1.21
  Bottom Layer w8: P3.29@-10.72,2133 v1(56,2133)
NetP3_31: P3.31 U1.26 | length 418.4
  Top Layer w8: v1(39,2060) 142,2060 301.53,1900.47 U1.26
  Bottom Layer w8: P3.31 37.96,2058.96 v1(39,2060)
NetP3_32: P3.32 U1.28 | length 417.6
  Top Layer w10: v1(39,2013) 125,2013 276.9,1861.1 U1.28
  Bottom Layer w10: P3.32 32.41,2019.59 v1(39,2013)
NetP3_33: P3.33 U1.30 | length 417.1
  Top Layer w10: v1(39,1981) 81,1981 240.27,1821.73 U1.30
  Bottom Layer w10: P3.33@-14.64,1981 v1(39,1981)
NetP3_34: P3.34 U1.32 | length 412.1
  Top Layer w10: v1(48,1937) 202.64,1782.36 U1.32
  Bottom Layer w10: P3.34@-11.57,1937 v1(48,1937)
NetP3_36: P3.36 U1.35 | length 589.9
  Top Layer w10: v1(51,1864) 257,1658 430,1658 445.73,1673.73 U1.35
  Bottom Layer w10: P3.36@-13.53,1864 v1(51,1864)
NetP3_37: P3.37 U1.37 | length 658.9
  Top Layer w10: v1(51,1819) 262,1608 425.25,1608 485.1,1667.85 U1.37
  Bottom Layer w10: P3.37 47.26,1822.74 v1(51,1819)
NetP3_38: P3.38 U1.39 | length 731.1
  Top Layer w10: v1(47,1779) 266.84,1559.16 441.16,1559.16 524.47,1642.47 U1.39
  Bottom Layer w10: P3.38@-11.05,1779 v1(47,1779)
NetP3_39: P3.39 U1.42 | length 826.6
  Top Layer w10: v1(61,1725) 278.84,1507.16 454.16,1507.16 583.53,1636.53 U1.42
  Bottom Layer w10: P3.39 42,1744 v1(61,1725)
NetP5_13: P5.13 R54.2 U1.61 | length 815.2
  Top Layer w8: v1(667,2366) 670.06,2362.94 P5.13 ; U1.61 827.58,2018.58 887,2078 944,2078 972,2106 R54.2@972,2127
  Bottom Layer w8: v1(667,2366) 667,2084 732,2019 v1(836,2019)
NetP5_18: P5.18 R36.2 R51.1 U1.64 | length 324.8
  Top Layer w8: P5.18 768.48,2153.52 789.69,2132.31 841,2132.31 841,2103 815.64,2077.64 U1.64
NetR4_2: R4.2 U1.56 | length 41.4
  Top Layer w6: v1(730.16,1920.16) U1.56
NetR11_1: R11.1 R12.1 U3.5 | length 89
  Top Layer w6: U3.5 997.6,1544.68 R12.1 R11.1
NetR23_1: R23.1 SW5.2 | length 40.5
  Top Layer w15: SW5.2@150,1325.84 R23.1
NetR37_1: R37.1 U2.44 | length 39
  Top Layer w8: R37.1@689.53,1015.16 U2.44
NetR38_2: R38.2 U2.7 | length 94.6
  Top Layer w8: U2.7 854.84,1199.84 R38.2
NetU1_48: U1.48
NetU1_49: U1.49
NetU1_50: U1.50
NetU1_51: U1.51
NetU1_55: U1.55 U2.18 | length 652.8
  Top Layer w6: 669.84,1368.84 669.84,1411.84 v1(675,1417) ; v1(699,1889) 710.69,1900.69 771.52,1900.69 U1.55
  Top Layer w8: U2.18 669.84,1368.84
  Bottom Layer w6: v1(675,1417) 699,1441 v1(699,1889)
NetU2_12: U2.12 | length 36.1
  Top Layer w8: U2.12 825.27,1298.27 v1(830,1303)
NetU2_13: U2.13 | length 35.3
  Top Layer w8: U2.13 768.27,1336.27 783,1351 v1(783,1347)
NetU2_14: U2.14 | length 117.7
  Top Layer w8: U2.14 748.58,1360.58 758,1370 798,1370 814,1354 v1(814,1347)
NetU2_29: U2.29
NetU10_7: U10.7
PA9: U2.30
PA10: U2.31
PA11: U2.32
PA12: U2.33
PA13: P2.3 U2.34 | length 602
  Top Layer w8: U2.34 441.1,1121.1 422,1102 422,943 541,824 639,824 659,844 P2.3
PA14: P2.2 U2.37 | length 205.7
  Top Layer w6: U2.37 551.73,1004.27 633.41,922.59 P2.2
TMDS_CLK_N: P5.12 U1.3 | length 152.4
  Top Layer w8: P5.12 650.37,2231.52 641.53,2222.68 641.53,2208.53 662.27,2187.8 U1.3
TMDS_CLK_P: P5.10 U1.4 | length 153.2
  Top Layer w8: P5.10 611,2231.52 622,2220.52 622,2202.61 642.58,2182.03 U1.4
TMDS_D0_N: P5.9 U1.6 | length 152
  Top Layer w8: P5.9 591.31,2231.52 583,2223.2 583,2208.01 603.21,2187.8 U1.6
TMDS_D0_P: P5.7 U1.7 | length 153.9
  Top Layer w8: P5.7 551.94,2231.52 565,2218.46 565,2200.56 583.53,2182.03 U1.7 U1.7@584,2147.99
TMDS_D1_N: P5.6 U1.9 | length 150.9
  Top Layer w8: P5.6 532.26,2231.52 525.23,2224.49 525.23,2207.23 538.48,2193.98 538.48,2193.48 544.16,2187.8 U1.9
TMDS_D1_P: P5.4 U1.10 | length 153.2
  Top Layer w8: P5.4 492.89,2231.52 505,2219.41 505,2202 517,2190 517,2189.5 524.47,2182.03 U1.10
TMDS_D2_N: P5.3 U1.12 | length 149.9
  Top Layer w8: P5.3 473.2,2231.52 467.44,2225.75 467.44,2216.44 485.1,2198.77 U1.12
TMDS_D2_P: P5.1 U1.13 | length 153.2
  Top Layer w10: P5.1 433.83,2230.52 448.44,2215.92 448.44,2208.56 465.42,2191.58 U1.13
pads on no net: P1.3 P1.4 P1.5 P1.6 P1.8 P1.18 P1.19 P1.24 P1.26 P1.27 P1.28 P1.31 P1.32 P1.33 P1.34 P1.36 P1.37 P1.38 P1.39 P2.4 P3.18 P3.19 P3.24 P5.14 SW5.3 SW5.4 U2.2 U2.3 U2.4 U2.10 U2.11 U2.15 U2.16 U2.21 U2.38 U2.39 U2.40 U2.41 U2.42 U2.43 U2.45 U2.46

## Polygon pours and split planes (outlines as drawn)
GND on Bottom Layer "GND_L02_P000" (solid, remove dead copper, pour order 0): -103,2669 -100,2666 1377,2666 1377,647 1357,627 1336,648 -118,648

## Keep-outs
Keep-Out Layer:
  lines w10: 1346.41,2599.47 ccw(c1307.04,2599.47) 1307.04,2638.84 -40.72,2638.84 ccw(c-40.72,2599.47) -80.09,2599.47 -80.09,705.09 ccw(c-40.72,705.09) -40.72,665.72 1307.04,665.72 ccw(c1307.04,705.09) 1346.41,705.09 1346.41,2602.73

## Silkscreen, mask and mechanical layers (free items; w line width, h text height)
Top Overlay:
  text "RX" at 966,2524 h39.37